# Altium PCB B6-1-1-焊接图纸.PcbDoc
Units mil, origin at the board's own origin, x right, y up, seen from the top; angles counter-clockwise.
Board outline 2086.62 x 2086.62 mil, 2 copper layers (Top Layer, Bottom Layer); 68 components, 44 nets, 192 pads, 45 vias.
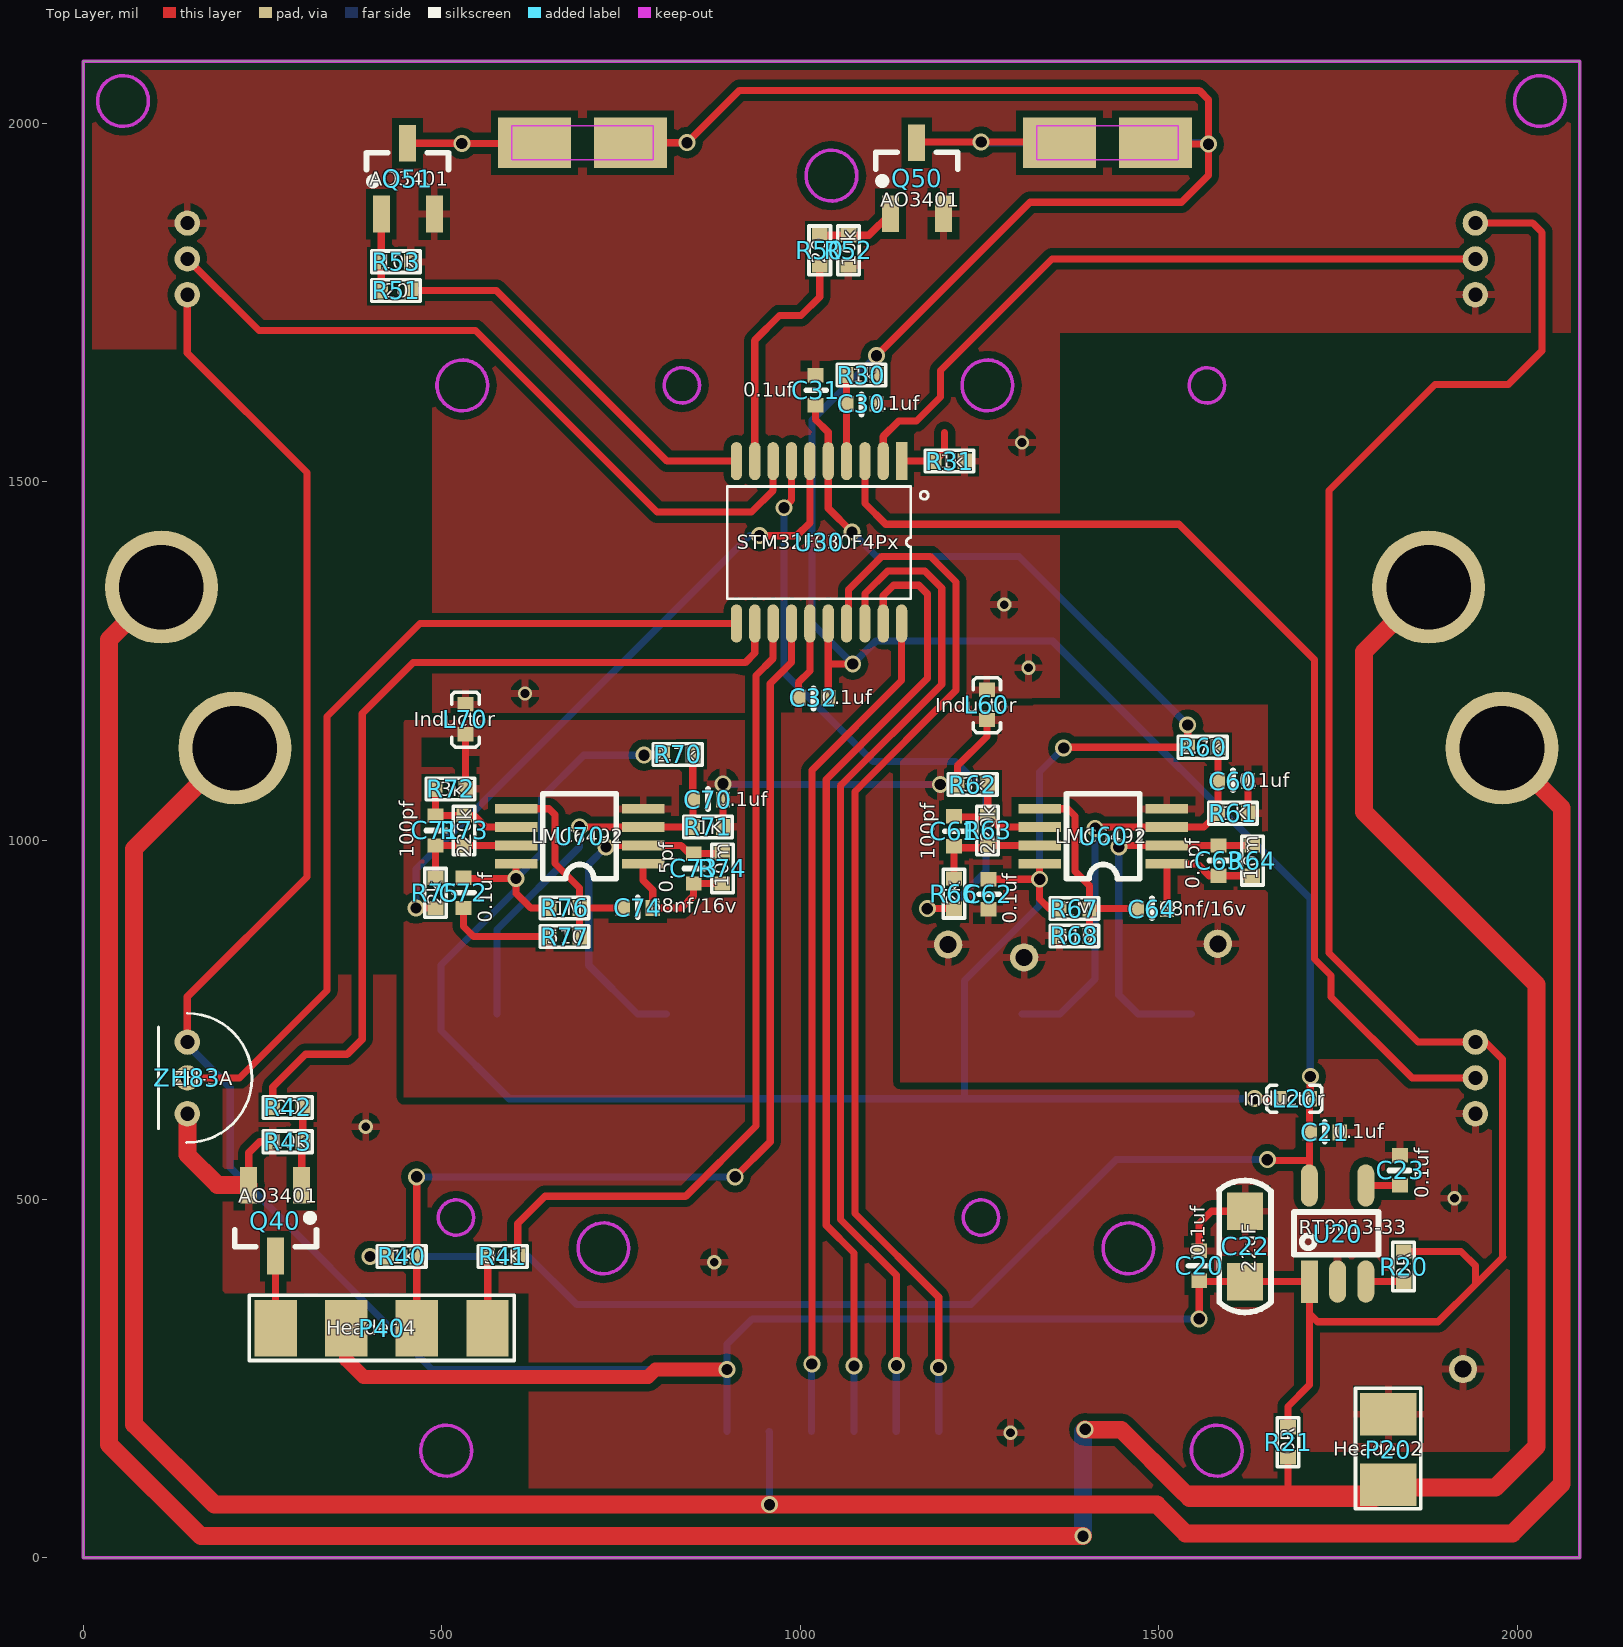
[diagram p0: Top Layer view]
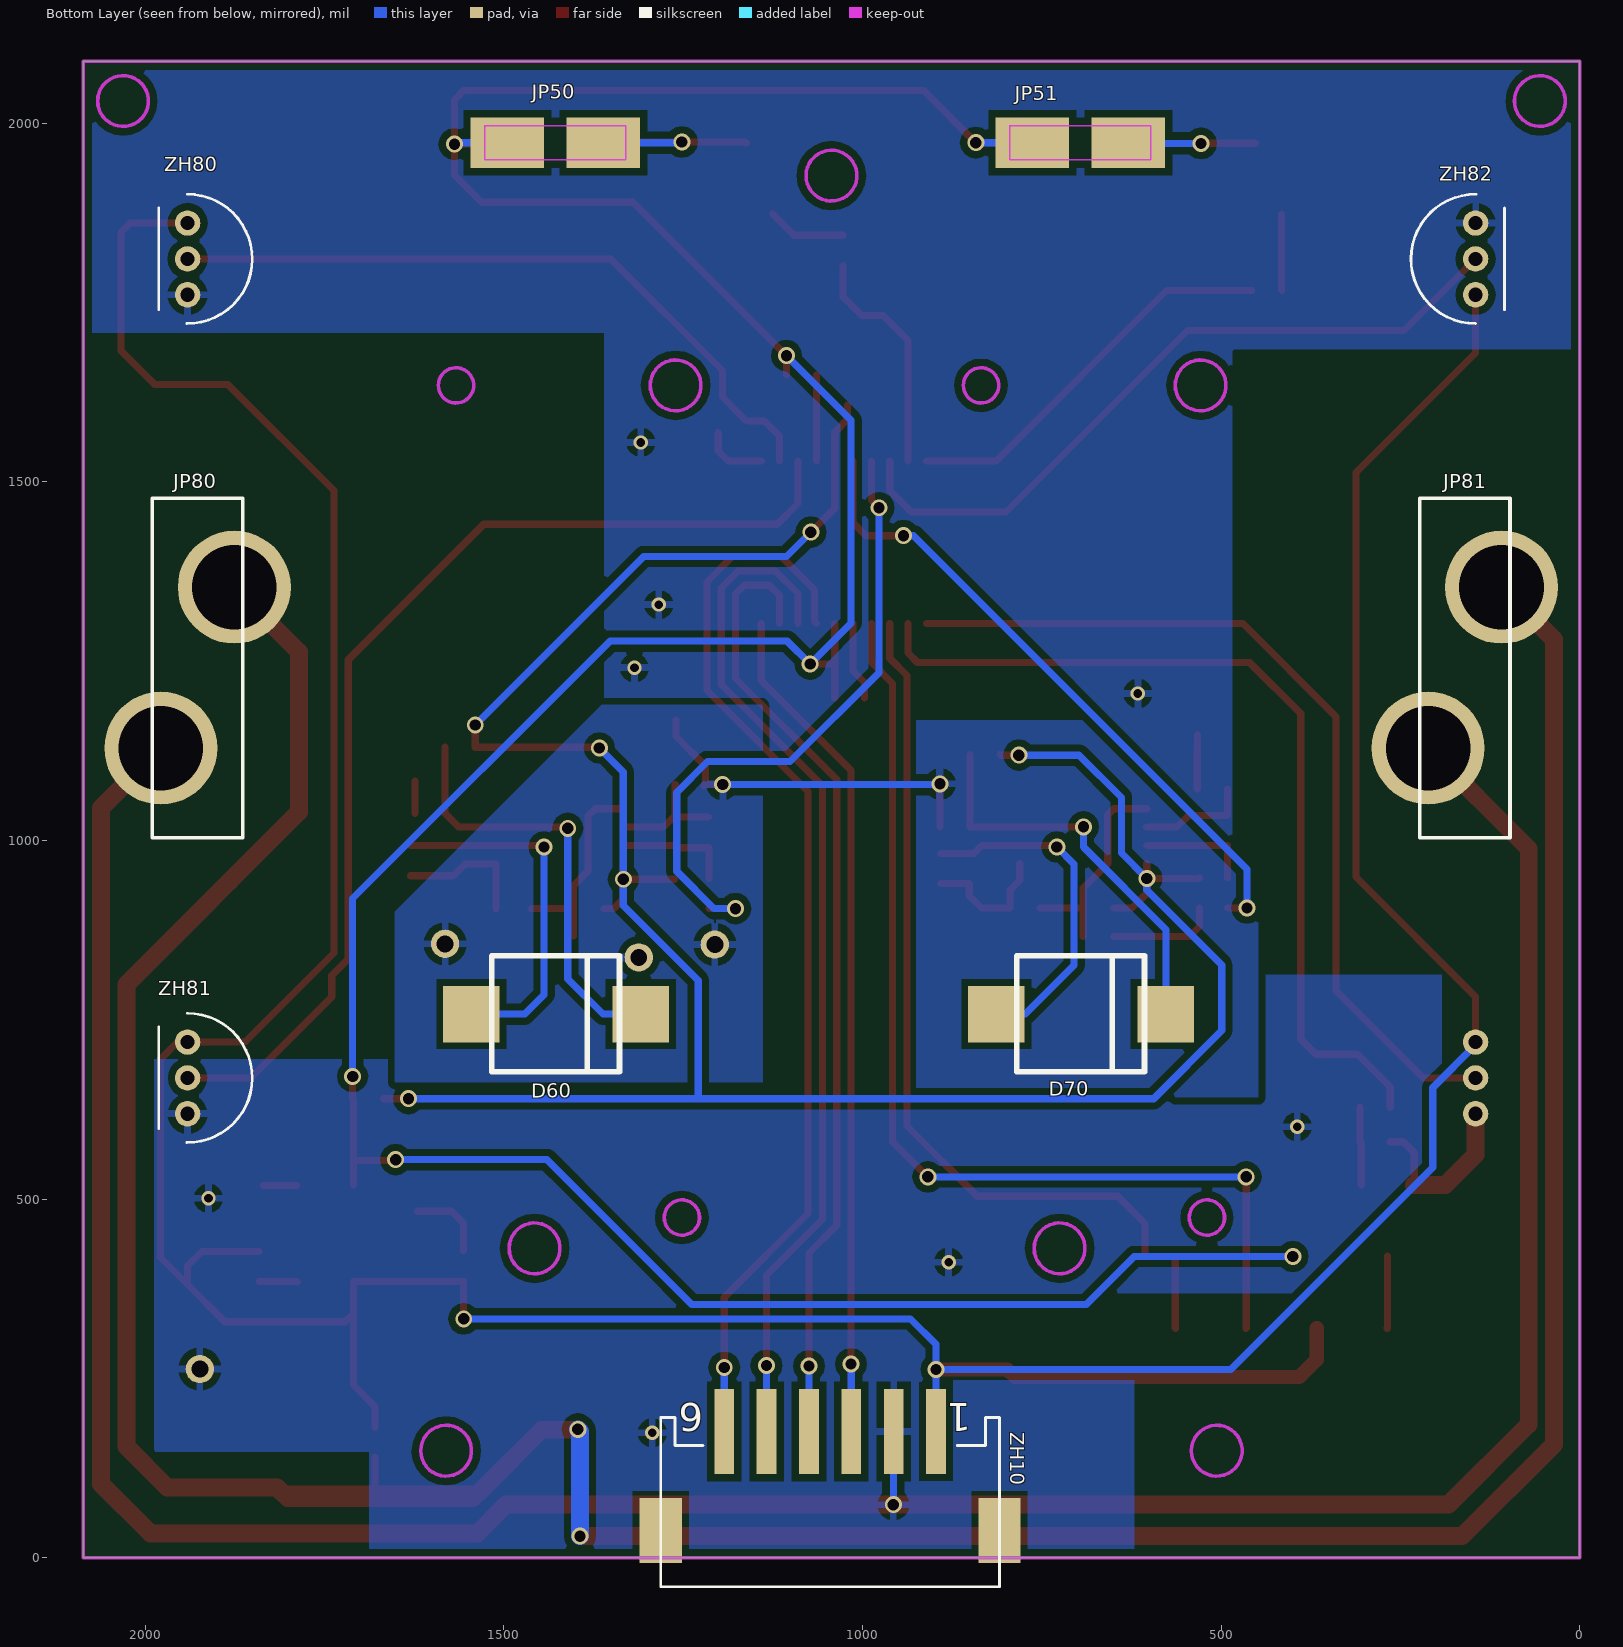
[diagram p1: Bottom Layer view, seen from below]

## Layer stack, top to bottom
Top Layer: signal copper 1.4
Dielectric: dielectric 12.6, FR-4, Dk 4.8
Bottom Layer: signal copper 1.4

## Board outline
0,0 0,2086.62 2086.62,2086.62 2086.62,0

## Design rules (kind name [scope] priority, off if disabled: settings)
Clearance [All] p1: gap=10
PolygonConnect [All] p1: connectstyle=Relief reliefconductorwidth=10 reliefentries=4 polygonreliefangle="90 Angle"
RoutingVias [All] p1: holewidth=15.75 width=23.62 viastyle="Through Hole" minholewidth=15.75 minwidth=23.62 maxholewidth=15.75 maxwidth=23.62
SilkscreenOverComponentPads [All] p1: minsilkscreentomaskgap=10
SolderMaskExpansion [All] p1: expansion=4
Width [All] p1: maxlimit=100 minlimit=5 preferedwidth=10 minimp=50.000000 maximp=50.000000 favimp=50.000000
27 further rules are at their usual default settings.

## Classes and differential pairs
component class U_CHECK2: C70 C71 C72 C73 C74 D70 L70 R70 R71 R72 R73 R74 R75 R76 R77 U70
component class U_CHECK: C60 C61 C62 C63 C64 D60 L60 R60 R61 R62 R63 R64 R66 R67 R68 U60
component class U_INTERFACE: ZH10
component class U_LASER: JP50 JP51 Q50 Q51 R50 R51 R52 R53
component class U_MCU_STM32: C30 C31 C32 R30 R31 U30
component class U_POWER: C20 C21 C22 C23 C200 C201 D200 J200 L20 L200 P20 R20 R21 U20
component class U_FAN: P40 Q40 R40 R41 R42 R43
component class U_TEMP: JP80 JP81 ZH80 ZH81 ZH82 ZH83

## Components (designator, comment, footprint, x,y, rotation, side; value= is the part's Value field where it differs from the comment)
C20 "0.1uf" C0402 1556.15,385.99 r90 top
C21 "0.1uf" C0402 1710.15,592.99 r0 top
C22 "22uF" 0805C 1656.15,345.99 r90 top
C23 "0.1uf" C0402 1836.15,518.99 r90 top
C30 "0.1uf" C0402 1106.15,1608.99 r180 top
C31 "0.1uf" C0402 1021.15,1648.99 r270 top
C32 "0.1uf" C0402 1039.15,1198.99 r180 top
C60 "0.1uf" C0402 1582.15,1082.99 r0 top
C61 "100pf" C0402 1214.15,1033.99 r270 top
C62 "0.1uf" C0402 1262.15,945.99 r270 top
C63 "0.5pf" C0402 1583.15,992.99 r270 top
C64 "68nf/16v" C0402 1469.15,904.49 r0 top
C70 "0.1uf" C0402 850.15,1056.99 r0 top
C71 "100pf" C0402 491.15,1034.99 r270 top
C72 "0.1uf" C0402 530.15,947.99 r270 top
C73 "0.5pf" C0402 851.15,981.99 r270 top
C74 "68nf/16v" C0402 752.15,905.99 r0 top
D60 "Photo Sen" PhotoSen 1427.15,757.99 r90 bottom
D70 "Photo Sen" PhotoSen 695.15,757.99 r90 bottom
JP50 "Header" LASER_2PIN_NEW 1495.15,1972.99 r270 bottom
JP51 "Header" LASER_2PIN_NEW 763.15,1972.99 r270 bottom
JP80 "Header" HEATER 1927.15,1240.99 r270 bottom
JP81 "Header" HEATER 160.15,1240.99 r270 bottom
L20 "Inductor" L0402 1670,640 r0 top
L60 "Inductor" L0402 1260,1170 r90 top
L70 "Inductor" L0402 533,1150 r90 top
P20 "Header 2" FAN_2PAD 1820,200 r0 top
P40 "Header 4" FAN_4PADS 416,320 r270 top
Q40 "AO3401" SI2300 268.15,459.99 r270 top
Q50 "AO3401" SI2300 1162.15,1933.58 r90 top
Q51 "AO3401" SI2300 452.15,1932.99 r90 top
R20 "0R" R0402 1841.15,426.99 r270 top
R21 "0R" R0402 1680,140 r90 top
R30 "1k" R0402 1064.15,1648.99 r0 top
R31 "1k" R0402 1186.99,1528.99 r0 top
R40 "1K" R0402 423,420 r0 top
R41 "30K" R0402 606,420 r180 top
R42 "20" R0402 306.15,627.99 r180 top
R43 "10k" R0402 306.15,579.99 r180 top
R50 "20" R0402 1026.99,1843.85 r270 top
R51 "20" R0402 415.15,1766.99 r0 top
R52 "10k" R0402 1066.99,1843.85 r270 top
R53 "10k" R0402 415.15,1806.99 r0 top
R60 "2.7k" R0402 1540,1130 r0 top
R61 "1K" R0402 1582.15,1037.99 r0 top
R62 "3k" R0402 1219.15,1077.99 r0 top
R63 "220k" R0402 1261.15,1034.99 r270 top
R64 "10m" R0402 1630.15,992.99 r270 top
R66 "2k" R0402 1214.15,904.99 r90 top
R67 "1M" R0402 1361.15,904.99 r0 top
R68 "510" R0402 1403.15,866.99 r180 top
R70 "2.7k" R0402 808,1120 r0 top
R71 "1K" R0402 850.15,1018.99 r0 top
R72 "3k" R0402 533.15,1071.99 r180 top
R73 "220k" R0402 531.15,1034.99 r270 top
R74 "10m" R0402 891.15,981.99 r270 top
R75 "2k" R0402 491.15,905.99 r90 top
R76 "1M" R0402 650.15,905.99 r0 top
R77 "510" R0402 692.15,865.99 r180 top
U20 "RT9013-33" SOT-23-5 1807.15,351.42 r90 top
U30 "STM32F030F4Px" TSSOP-20 1141.15,1528.99 r270 top
U60 "LMC6492" MSOP8 1422.15,1005.99 r180 top
U70 "LMC6492" MSOP8 692.15,1005.99 r180 top
ZH10 "ZH-6ABW" ZH-6ABW 1045.15,175.99 r0 bottom
ZH80 "ZH-3A" DS18B20 1941.15,1810.99 r90 bottom
ZH81 "ZH-3A" DS18B20 1941.15,668.99 r90 bottom
ZH82 "ZH-3A" DS18B20 145.15,1810.99 r270 bottom
ZH83 "ZH-3A" DS18B20 145.15,668.99 r90 top

## Footprints (in the part's own frame and the unit in brackets; to place one, negate y for a bottom-side part, rotate by r counter-clockwise, add the part's x,y. Pads: shape width x height; smd on the part's side, far side on the other; paste and mask are expansions set on the pad)
0805C [mil]
  rect 52.13x50 smd: 1(39,36) 2(137,36)
  silkscreen extent -4,0 180,72
C0402 [mil] "CAP_NP_C0402"
  rect 20x22 smd: 1(0,0) 2(42,0)
  silkscreen extent 21,-13 21,15
DS18B20 [mm]
  round 0.9 hole 0.5: 1(-1.27,0) 2(0,0) 3(1.27,0)
  silkscreen extent -2.29,-2.29 2.29,1.02
FAN_2PAD [mm]
  rect 2x1.5 smd: 1(0,-2.5) 2(0,0)
  silkscreen extent -1.17,-3.35 1.14,0.91
FAN_4PADS [mm]
  rect 2x1.5 smd: 1(0,3.75) 2(0,1.25) 3(0,-1.25) 4(0,-3.75)
  silkscreen extent -1.17,-4.69 1.14,4.7
HEATER [mm]
  round 4 hole 3: 1(-2.85,1.3) 2(2.85,-1.3)
  silkscreen extent -6,-1.6 6.02,1.6
L0402 [mil]
  rect 20x22 smd: 1(-2,0) 2(40,0)
  silkscreen extent -20,-19 57,19
LASER_2PIN_NEW [mm]
  rect 1.8x2.6 smd far side: 1(0,3.4) 2(0,0)
  rect 1.8x2.6 smd: 1(0,3.4) 2(0,0)
  Keep-Out Layer lines w0.05: 0.6,4.2 0.6,-0.8 -0.6,-0.8 -0.6,4.2 0.6,4.2
MSOP8 [mm]
  rect 1.5x0.35 smd: 1(-2.25,0.975) 2(-2.25,0.325) 3(-2.25,-0.325) 4(-2.25,-0.975) 5(2.25,-0.975) 6(2.25,-0.325) 7(2.25,0.325) 8(2.25,0.975)
  silkscreen extent -1.3,-1.5 1.3,1.5
PhotoSen [mm]
  rect 2x2 smd: 1(0,-3) 2(0,3)
  silkscreen extent -2.04,-2.24 2.07,2.28
R0402 [mil] "RESISTOR-R0402"
  rect 20x22 smd: 1(0,0) 2(42,0)
  silkscreen extent -13,-15 55,15
SI2300 [mm] "SOT23, 3-Leads, Body 2.9x2.4mm (max), Pitch 0.95mm, IPC Medium Density"
  rect 1.3x0.6 smd: 1(-1.511,0.927) 2(-1.511,-0.95) 3(1,0)
  silkscreen extent -0.48,-1.45 0.66,1.45
SOT-23-5 [mm]
  rect 1.5x0.6 smd: 1(0.851,2.476)
  oval 1.5x0.6 smd: 2(0.851,1.476) 3(0.851,0.476) 4(4.257,0.476) 5(4.257,2.477)
  silkscreen extent 1.8,0.03 3.31,3.02
TSSOP-20 [mm]
  rect 1.35x0.4 smd mask+0.05: 1(0,0)
  oval 1.35x0.4 smd mask+0.05: 2(0,-0.65) 3(0,-1.3) 4(0,-1.95) 5(0,-2.6) 6(0,-3.25) 7(0,-3.9) 8(0,-4.55) 9(0,-5.2) 10(0,-5.85) 11(5.75,-5.85) 12(5.75,-5.2) 13(5.75,-4.55) 14(5.75,-3.9) 15(5.75,-3.25) 16(5.75,-2.6) 17(5.75,-1.95) 18(5.75,-1.3) 19(5.75,-0.65) 20(5.75,0)
  silkscreen extent 0.9,-6.18 4.87,0.94
ZH-6ABW [mm]
  rect 1.5x2.3 smd: 0(-6,3.5) 0(6,3.5)
  rect 0.7x3 smd: 1(-3.75,0) 2(-2.25,0) 3(-0.75,0) 4(0.75,0) 5(2.25,0) 6(3.75,0)
  silkscreen extent -6,-0.5 6,5.5

## Part data
C20 C21 C23: library part CC
C22: library part CTaA, "Tantalum Capacitor A"
C30 C31 C32: library part C0402, "Capacitor 0402"
C60 C61 C62 C63 C64 C70 C71 C72 C73 C74: library part CC, "C"
D60 D70: "Photosensitive Diode"
JP50 JP51 JP80 JP81: library part "Header 2", "Header, 2-Pin"
P20: "Header, 2-Pin"
P40: "Header, 4-Pin"
Q40 Q50 Q51: library part MOSFET-N, "N-Channel MOSFET"
R20 R21 R30 R31 R40 R41: library part R0402, "Resistor 0402"
R42 R43 R50 R51 R52 R53: library part RES1
R60 R61 R62 R63 R64 R66 R67 R68 R70 R71 R72 R73 R74 R75 R76 R77: library part RES1, "R"
ZH10 ZH80 ZH81 ZH82 ZH83: "1.5mm"

## Free pads (board coordinates)
  round 39.37 hole 23.62: 0(1206,855) 0(1312,837) 0(1582,856) 1(1924,263)

## Via types
v1: diameter 23.62, hole 15.75, Top Layer to Bottom Layer, 37 vias
v2: diameter 20, hole 12, Top Layer to Bottom Layer, 8 vias

## Nets (pads, with @x,y where several pads share a name; then routed paths per layer and width w, separated by ;. In a path a pad name is that pad's centre, name@x,y a point inside that pad or via, vN(x,y) a via of type N, cw(c..) or ccw(c..) an arc to the next point about the centre after c; other vN are vias at no path point)
ADC_AC: R66.1 U30.7 | length 901.2
  Top Layer w10: v1(977,1464) 987.61,1474.61 U30.7 ; v1@1177.01,904.99 R66.1
  Bottom Layer w10: v1(977,1464) 977,1234 1101,1110 1216,1110 1259,1067 1259,957 1207,905 v1(1177,905)
ADC_AC2: R75.1 U30.6 | length 916.3
  Top Layer w10: v1@464.01,905.99 R75.1 ; v1(943,1425) 995,1425 1013.2,1443.2 U30.6
  Bottom Layer w10: v1(464,906) 464,960 929,1425 v1(943,1425)
AGND: C60.2 C62.2 C70.2 C72.2 L60.1 L70.1 pad.0 R61.2 R62.1 R68.2 R71.2 R72.1 R77.2 U60.4 U70.4 | length 820.4
  Top Layer w10: C72.2 530.15,879.99 544.15,865.99 R77.2 ; L70.1 533,1072.14 R72.1 533.15,1122.99 ; v1(892,1079) 892,1057.14 C70.2 R71.2 ; v1@1195.01,1077.99 R62.1 1219.15,1104.15 1260,1145 L60.1 ; R62.1@1221.15,1075.99 R62.1@1221.15,1077.99 ; R61.2 C60.2
  Bottom Layer w10: v1(892,1079) 893,1078 v1(1195,1078)
AVCC33: C31.2 C62.1 C72.1 L20.1 R60.1 R67.1 R70.1 R76.1 U30.5 U60.8 U70.8 | length 3637.3
  Top Layer w10: C72.1 531.15,946.99 v1(603.57,946.99) ; U70.8 v1(603.57,946.99) ; R76.1 624.15,905.99 603.57,926.57 v1(603.57,946.99) ; v1(782,1119) 807,1119 R70.1 ; C31.2 1021.15,1586.99 1038.79,1569.35 U30.5 1038.79,1463.21 v1(1072,1430) ; C62.1 v1(1333.57,945.99) ; U60.8 v1(1333.57,945.99) ; R67.1 1347.15,904.99 1333.57,918.57 v1(1333.57,945.99) ; v1(1367,1129) 1368,1130 R60.1 v1(1540,1161) ; v1(1633,640) L20.1
  Bottom Layer w10: v1(782,1119) 698,1119 639,1060 639,982.42 v1(603.57,946.99) 603.57,930.85 499,826.28 499,735 594,640 1230,640 ; v1(1072,1430) 1106,1396 1305,1396 v1(1540,1161) ; v1(1367,1129) 1333.57,1095.57 v1(1333.57,945.99) 1333.57,909.57 1229,805 1229,641 1230,640 ; v1(1633,640) 1230,640
DVCC5: C20.1 C22.1 P40.3 R20.1 R21.2 U20.1 ZH10.1 ZH80.3 ZH81.3 ZH82.3 ZH83.3 | length 6305.7
  Top Layer w10: ZH83.3 145.15,782.15 312,949 312,1513 145.15,1679.85 ZH82.3 ; v1(1556,333) 1556.15,333.15 C20.1 1557.22,384.92 U20.1 1709.65,340.49 ; R21.2 1680,211 1709.65,240.65 1709.65,340.49 ; R20.1 1921.16,426.99 1941.15,407 1941.15,380.99 ; ZH80.3 2021.01,1860.99 2034,1848 2034,1683 1987,1636 1885,1636 1737,1488 1737,843 1861.01,718.99 ZH81.3 1955.01,718.99 1979.01,694.99 1979.01,419.8 ; 1979.49,419.33 1941.15,380.99 ; 1709.65,340.49 1721.15,328.99 1889.15,328.99 1941.15,380.99
  Top Layer w20: P40.3 366.79,276.21 391,252 787.49,252 798,262.51 v1(897.51,262.51)
  Bottom Layer w10: ZH83.3 145.15,715.26 205,655.41 205,544 486.49,262.51 v1(897.51,262.51) ; ZH10.1 v1(897.51,262.51) ; v1(1556,333) 933,333 897.51,297.51 v1(897.51,262.51)
DVCC12: JP80.1 JP81.1 P20.1 R21.1 | length 5149.8
  Top Layer w10: 1530,95.8 P20.1@1814.23,95.8 ; 1680,97.8 R21.1 ; 1875.97,942.14 1875.97,939.03 1878.17,936.83
  Top Layer w25: JP81.1 36,1280.23 36,158 164,30 v1(1394,30) ; v1(1397,179) 1397.57,178.43 1447.38,178.43 1530,95.8 1542.8,83 1801.43,83 1814.23,95.8 P20.1@1816.23,97.8 ; P20.1@1820,97.8 1969.42,97.8 2026.5,154.88 2026.5,799.11 1786,1039.61 1786,1263.23 JP80.1
  Bottom Layer w25: v1(1394,30) 1394,176 v1(1397,179)
DVCC33: C21.1 C32.1 JP50.2@1495.15,1972.99 JP51.2@763.15,1972.99 L20.2 R30.2 R40.1 U20.5 U30.16 | length 5042.9
  Top Layer w10: v1(400,420) R40.1 ; 763.16,1973 v1(842,1973) 915,2046 1556,2046 1569,2033 v1(1569,1971) ; C32.1@1038.79,1198.99 1038.79,1246 ; U30.16 1038.79,1246 ; v1(1073,1246) 1038.79,1246 ; v1(1106,1676) 1320,1890 1531.37,1890 1569,1927.63 v1(1569,1971) ; R30.2 v1@1106.15,1675.85 ; 1495.15,1972.99 1497.14,1971 v1(1569,1971) ; v1(1651,555) 1652,554 1709.65,554 ; U20.5 1709.65,554 ; L20.2@1711,639.84 1709.65,638.49 1709.65,554 ; L20.2@1711,640 v1(1711,671)
  Bottom Layer w10: v1(400,420) 621,420 688,353 1238,353 1440,555 v1(1651,555) ; JP51.2@763.15,1972.99 v1(842,1973) ; v1(1106,1676) 1016,1586 1016,1303 v1(1073,1246) 1105,1278 1352,1278 1711,919 v1(1711,671) ; JP50.2@1495.15,1972.99 1567.01,1972.99 v1(1569,1971)
  Bottom Layer w12: JP50.2@1495,1972.84 JP50.2@1495.15,1972.99
FAN_EN: R42.2 U30.12 | length 1258.3
  Top Layer w10: R42.2 264.15,656.15 310,702 368,702 389,723 389,1177 460,1248 923,1248 936.42,1261.42 U30.12
GND: C20.2 C21.2 C22.2 C23.2 C30.1 C31.1 C32.2 JP80.2 JP81.2 L60.2 L70.2 P20.2 pad.1 Q40.2 Q50.2 Q51.2 R31.2 R43.2 R52.2 R53.2 U20.2 U30.15 ZH10.2 ZH80.1 ZH81.1 ZH82.1 ZH83.1 | length 4755.3
  Top Layer w10: 66,383 71,378 ; Q40.2 230.75,564.59 246.15,579.99 R43.2 ; C32.2 997.15,1220.15 1013.2,1236.2 U30.15 ; C20.2 1556.15,465.99 1573.15,482.99 C22.2
  Top Layer w25: 71,383 71,378 ; ZH83.1 145.15,561.85 187.51,519.49 Q40.2 ; JP81.2 71,988.45 71,378 ; 1869,34 1853,34 ; JP80.2 2061.62,1045.5 2061.62,204 ; 2061.62,187 2061.62,204 ; 71,378 71,186 183,74 v1(957,74) 1497,74 1537,34 1853,34 ; 1853,34 1993,34 2061.62,102.62 2061.62,204
  Bottom Layer w10: ZH10.2 957,175.56 v1(957,74)
  other v2: 1293,174 880,412 1912,501 394,601 616,1205 1318,1241 1284,1329 1309,1555
GPIO_FAN: R41.1 U30.13 | length 1144.9
  Top Layer w10: R41.1 606,466 644,504 840,504 938,602 938,1230 962.02,1254.02 U30.13
GPIO_LASER: R50.2 U30.9 | length 327.9
  Top Layer w10: U30.9 936.42,1697.42 971,1732 1001,1732 1026.99,1757.99 R50.2
GPIO_LASER2: R51.2 U30.10 | length 552.3
  Top Layer w10: R51.2 576.01,1766.99 814.01,1528.99 U30.10
NetC23_1: C23.1 U20.4 | length 47.7
  Top Layer w10: U20.4 C23.1
NetC60_1: C60.1 D60.1 R60.2 R61.1 U60.3 | length 604.1
  Top Layer w10: v1(1411,1017) 1412.79,1018.79 U60.3 1562.95,1018.79 R61.1 C60.1 R60.2@1582.15,1129.99
  Bottom Layer w10: D60.1 1361.99,757.99 1411,807 v1(1411,1017)
NetC61_1: C61.1 R62.2 R63.1 U60.6 | length 170.1
  Top Layer w10: C61.1@1215.15,1032.99 1261.15,1032.99 R63.1 ; R62.2 R63.1 ; U60.6 1277.35,1018.79 R63.1
NetC61_2: C61.2 R63.2 R66.2 U60.7 | length 159.2
  Top Layer w10: R66.2 1214.15,989.99 R63.2@1260.15,989.99 ; R63.2@1263.35,993.19 U60.7
NetC63_1: C63.1 D60.2 R64.1 U60.2 | length 509.8
  Top Layer w10: v1(1444,991) 1444,993 1444.19,993.19 U60.2 1629.95,993.19 R64.1
  Bottom Layer w10: v1@1444,994 1444,785 1471.01,757.99 D60.2
NetC63_2: C63.2 C64.2 R64.2 U60.1 | length 188.4
  Top Layer w10: C64.2 1511.15,967.19 1553.95,967.19 1570.15,950.99 C63.2 R64.2
NetC64_1: C64.1 R67.2 R68.1 U60.5 | length 288.3
  Top Layer w10: U60.5 1372.62,1044.38 1383,1034 1383,957 1403.15,936.85 R67.2 ; R68.1 R67.2 ; C64.1@1462.15,904.49 1461.65,904.99 R67.2
NetC70_1: C70.1 D70.1 R70.2 R71.1 U70.3 | length 604
  Top Layer w10: v1(692,1019) 692.21,1018.79 U70.3 780.94,1018.99 R71.1 C70.1 ; R70.2 850,1057.14 C70.1 ; 850.15,1092.99 C70.1
  Bottom Layer w10: D70.1 577.04,876.04 690.96,989.96 692,991 v1(692,1019)
NetC71_1: C71.1 R72.2 R73.1 U70.6 | length 156.1
  Top Layer w10: R72.2 C71.1 R73.1 545.15,1034.99 561.35,1018.79 U70.6
NetC71_2: C71.2 R73.2 R75.2 U70.7 | length 157.5
  Top Layer w10: R75.2 C71.2 R73.2 603.36,992.99 U70.7
NetC73_1: C73.1 D70.2 R74.1 U70.2 | length 480.2
  Top Layer w10: v1(729,991) 729,993 729.19,993.19 U70.2 833.73,993.19 844.94,981.99 C73.1 R74.1
  Bottom Layer w10: v1(729,991) 705,967 705,826 773.01,757.99 D70.2
NetC73_2: C73.2 C74.2 R74.2 U70.1 | length 188.2
  Top Layer w10: U70.1 780.73,944.41 794.15,930.99 C74.2 834.15,905.99 851.15,922.99 C73.2 R74.2
NetC74_1: C74.1 R76.2 R77.1 U70.5 | length 302.1
  Top Layer w10: U70.5 649.62,1044.38 658,1036 658,968 692.15,933.85 R76.2 ; R77.1 R76.2 ; C74.1 R76.2
NetJP50_1: JP50.1@1361.29,1972.99 Q50.3 | length 309.7
  Top Layer w10: Q50.3 1163.2,1974 v1(1252,1974) 1360.28,1974 1361.29,1972.99
  Bottom Layer w10: v1(1252,1974) 1253.01,1972.99 JP50.1@1361.29,1972.99
NetJP51_1: JP51.1@629.29,1972.99 Q51.3 | length 279.4
  Top Layer w10: Q51.3 527.64,1972.36 v1(528,1972) 628.3,1972 629.29,1972.99
  Bottom Layer w10: v1(528,1972) 628.3,1972 JP51.1@629.29,1972.99
NetP40_1: P40.1 R41.2 | length 100.2
  Top Layer w10: P40.1 564,320.36 R41.2
NetP40_4: P40.4 Q40.3 | length 100.7
  Top Layer w10: Q40.3 268.15,320.21 P40.4
NetQ40_2: Q40.1 R42.1 R43.1 | length 109.1
  Top Layer w10: Q40.1 304.65,578.49 R43.1 R42.1
NetQ50_2: Q50.1 R50.1 R52.1 | length 111.2
  Top Layer w10: R50.1 R52.1 1095.42,1843.85 Q50.1
NetQ51_2: Q51.1 R51.1 R53.1 | length 106.7
  Top Layer w10: R51.1 415.65,1767.49 Q51.1
NetR20_2: R20.2 U20.3 | length 53
  Top Layer w10: U20.3@1788.15,384.68 U20.3 R20.2@1841.08,384.92
NetR31_1: R31.1 U30.1 | length 91.7
  Top Layer w10: U30.1 R31.1 1201.15,1543.15 1201.15,1568.99
RESET: C30.2 R30.1 U30.4 | length 120.1
  Top Layer w10: R30.1 1064.15,1588.99 1064.15,1529.22 U30.4
RX: U30.18 ZH10.5 | length 1438.8
  Top Layer w10: U30.18 1089.97,1344.25 1121.72,1376 1173.28,1376 1197,1352.28 1197,1217.72 1056,1076.72 1056,471.72 1134,393.72 v1(1134,268)
  Bottom Layer w10: ZH10.5 1133.73,267.73 v1(1134,268)
SWCLK: U30.20 ZH10.3 | length 1178.6
  Top Layer w10: v1(1016,270) 1016,1098 1141.15,1223.15 U30.20
  Bottom Layer w10: ZH10.3 1015.62,269.62 v1(1016,270)
SWDIO: U30.19 ZH10.4 | length 1353.8
  Top Layer w10: v1(1074.68,267.32) 1074.68,424.75 1036,463.43 1036,1085 1177,1226 1177,1344 1165,1356 1130,1356 1115.56,1341.56 U30.19
  Bottom Layer w10: ZH10.4 v1(1074.68,267.32)
TEMP_DATA1: U30.2 ZH80.2 | length 984.3
  Top Layer w10: U30.2 1115.56,1563.56 1137,1585 1162,1585 1195.28,1618.28 1195.28,1655.28 1350.99,1810.99 ZH80.2
TEMP_DATA2: U30.3 ZH81.2 | length 1503.8
  Top Layer w10: U30.3 1089.97,1470.03 1119,1441 1528,1441 1717,1252 1717,834.72 1740,811.72 1740,782 1853.01,668.99 ZH81.2
TEMP_DATA3: U30.8 ZH82.2 | length 1016.5
  Top Layer w10: ZH82.2 245.14,1711 547,1711 800,1458 932,1458 962.02,1488.02 U30.8
TEMP_DATA4: U30.11 ZH83.2 | length 1251.9
  Top Layer w10: ZH83.2 217.99,668.99 340,791 340,1173 469.61,1302.61 U30.11
TIM_FAN: P40.2 R40.2 U30.14 | length 1459.3
  Top Layer w10: v1(465,531) R40.2 465,320.21 P40.2 ; v1(909,531) 958,580 958,1219 987.61,1248.61 U30.14
  Bottom Layer w10: v1(465,531) v1(909,531)
TX: U30.17 ZH10.6 | length 1523.3
  Top Layer w10: U30.17 1067.09,1305.33 1067.09,1349.66 1113.43,1396 1181.57,1396 1217,1360.57 1217,1209.43 1076,1068.43 1076,480 1192.79,363.21 v1(1192.79,265.21)
  Bottom Layer w10: ZH10.6 v1(1192.79,265.21)
pads on no net: JP50.1@1361.29,1972.99 JP50.2@1495.15,1972.99 JP51.1@629.29,1972.99 JP51.2@763.15,1972.99 ZH10.0

## Polygon pours and split planes (outlines as drawn)
GND on Top Layer "Top Layer-No Net" (solid, remove dead copper, pour order 1001): 610,-93 621,-82 621,528 1682,528 1718,492 1688,462 1688,-98 615,-98 610,-93
GND on Top Layer "Top Layer-No Net" (solid, remove dead copper, pour order 1000): 1992.11,148 1555.8,148 1554.85,149 1548.19,156 1548.19,369 197.44,369 196.49,370 194.59,372 194.59,813 476.91,813 477.86,814 486.41,823 486.41,1682 483.56,1685 -44,1685 -44,2149 -43.05,2150 -6.93,2188 2148,2188 2148,1712 2144.2,1708 1361.88,1708 1361.88,723 1388.51,694.99 1989.26,694.99 1989.26,150.99 1992.11,148
AGND on Top Layer "Top Layer-No Net" (solid, remove dead copper, pour order 1000): 1136,1189 1139.22,1186 1139.22,663 1653,663 1651.93,664 1651.93,1189 1136,1189
AGND on Top Layer "Top Layer-No Net" (solid, remove dead copper, pour order 1000): 444,1168 447,1165 447,642 925,642 924,643 924,1168 444,1168
GND on Bottom Layer "Top Layer-No Net" (solid, remove dead copper, pour order 1003): 1990.11,148 1553.8,148 1552.85,149 1546.19,156 1546.19,369 195.44,369 194.49,370 192.59,372 192.59,813 474.91,813 475.86,814 484.41,823 484.41,1682 481.56,1685 -46,1685 -46,2149 -45.05,2150 -8.93,2188 2146,2188 2146,1712 2142.2,1708 1359.88,1708 1359.88,723 1386.51,694.99 1987.26,694.99 1987.26,150.99 1990.11,148
GND on Bottom Layer "Top Layer-No Net" (solid, remove dead copper, pour order 1002): 610,-92 621,-81 621,529 1682,529 1718,493 1688,463 1688,-97 615,-97 610,-92
AGND on Bottom Layer "Top Layer-No Net" (solid, remove dead copper, pour order 1000): 1136,1189 1139.22,1186 1139.22,663 1653,663 1651.93,664 1651.93,1189 1136,1189
AGND on Bottom Layer "Top Layer-No Net" (solid, remove dead copper, pour order 1000): 445,1168 448,1165 448,642 926,642 925,643 925,1168 445,1168

## Keep-outs
Keep-Out Layer:
  circle w5: c1457.35,431.36 r35.43
  circle w5: c1260.7,1634.65 r35.43
  circle w5: c1251.86,474.3 r24.61
  circle w5: c1566.82,1634.65 r24.61
  circle w5: c725.3,431.36 r35.43
  circle w5: c528.64,1634.65 r35.43
  circle w5: c519.8,474.3 r24.61
  circle w5: c834.76,1634.65 r24.61
  circle w5: c55.49,2031.12 r35.43
  circle w5: c506.02,149.19 r35.43
  circle w5: c1580.6,149.19 r35.43
  circle w5: c2031.12,2031.12 r35.43
  circle w5: c1043.31,1927.07 r35.43
  lines w5: 0,0 0,2086.62 2086.62,2086.62 2086.62,0 0,0

## Silkscreen, mask and mechanical layers (free items; w line width, h text height)
Bottom Solder:
  lines w5: 100.58,1003.94 218.69,1003.94 218.69,1476.38 100.58,1476.38 100.58,1003.94 ; 136.99,605.51 136.99,624.41 153.53,624.41 153.53,605.51 136.99,605.51 ; 136.99,659.84 136.99,678.74 153.53,678.74 153.53,659.84 136.99,659.84 ; 136.99,714.17 136.99,733.07 153.53,733.07 153.53,714.17 136.99,714.17 ; 136.99,1747.25 136.99,1766.14 153.53,1766.14 153.53,1747.25 136.99,1747.25 ; 136.99,1801.58 136.99,1820.47 153.53,1820.47 153.53,1801.58 136.99,1801.58 ; 136.99,1855.91 136.99,1874.8 153.53,1874.8 153.53,1855.91 136.99,1855.91 ; 603.22,1952.76 788.26,1952.76 788.26,1992.13 603.22,1992.13 603.22,1952.76 ; 607.15,688.98 784.32,688.98 784.32,826.77 607.15,826.77 607.15,688.98 ; 807.09,-39.37 1279.53,-39.37 1279.53,0 1279.53,157.48 807.09,157.48 807.09,0 807.09,-39.37 ; 1335.27,1952.76 1335.27,1992.13 1520.31,1992.13 1520.31,1952.76 1335.27,1952.76 ; 1339.21,688.98 1516.38,688.98 1516.38,826.77 1339.21,826.77 1339.21,688.98 ; 1867.93,1003.94 1986.04,1003.94 1986.04,1476.38 1867.93,1476.38 1867.93,1003.94 ; 1933.09,605.51 1933.09,624.41 1949.62,624.41 1949.62,605.51 1933.09,605.51 ; 1933.09,659.84 1933.09,678.74 1949.62,678.74 1949.62,659.84 1933.09,659.84 ; 1933.09,714.17 1933.09,733.07 1949.62,733.07 1949.62,714.17 1933.09,714.17 ; 1933.09,1747.25 1933.09,1766.14 1949.62,1766.14 1949.62,1747.25 1933.09,1747.25 ; 1933.09,1801.58 1933.09,1820.47 1949.62,1820.47 1949.62,1801.58 1933.09,1801.58 ; 1933.09,1855.91 1933.09,1874.8 1949.62,1874.8 1949.62,1855.91 1933.09,1855.91

## Text inside footprints (layer, text, board x,y; h text height)
ZH10: Bottom Overlay "6" at 1222.32,215.36 h39.37 r180; Bottom Overlay "1" at 848.3,215.36 h39.37 r180